# Altium PCB soldeerbout.PcbDoc (part 2 of 2)
Units mil, origin at the board's own origin, x right, y up, seen from the top; angles counter-clockwise.
Board outline 6625 x 4130 mil, 2 copper layers (Top Layer, Bottom Layer); 76 components, 74 nets, 291 pads, 71 vias.
Unrouted connection lines stored in the file: 2.
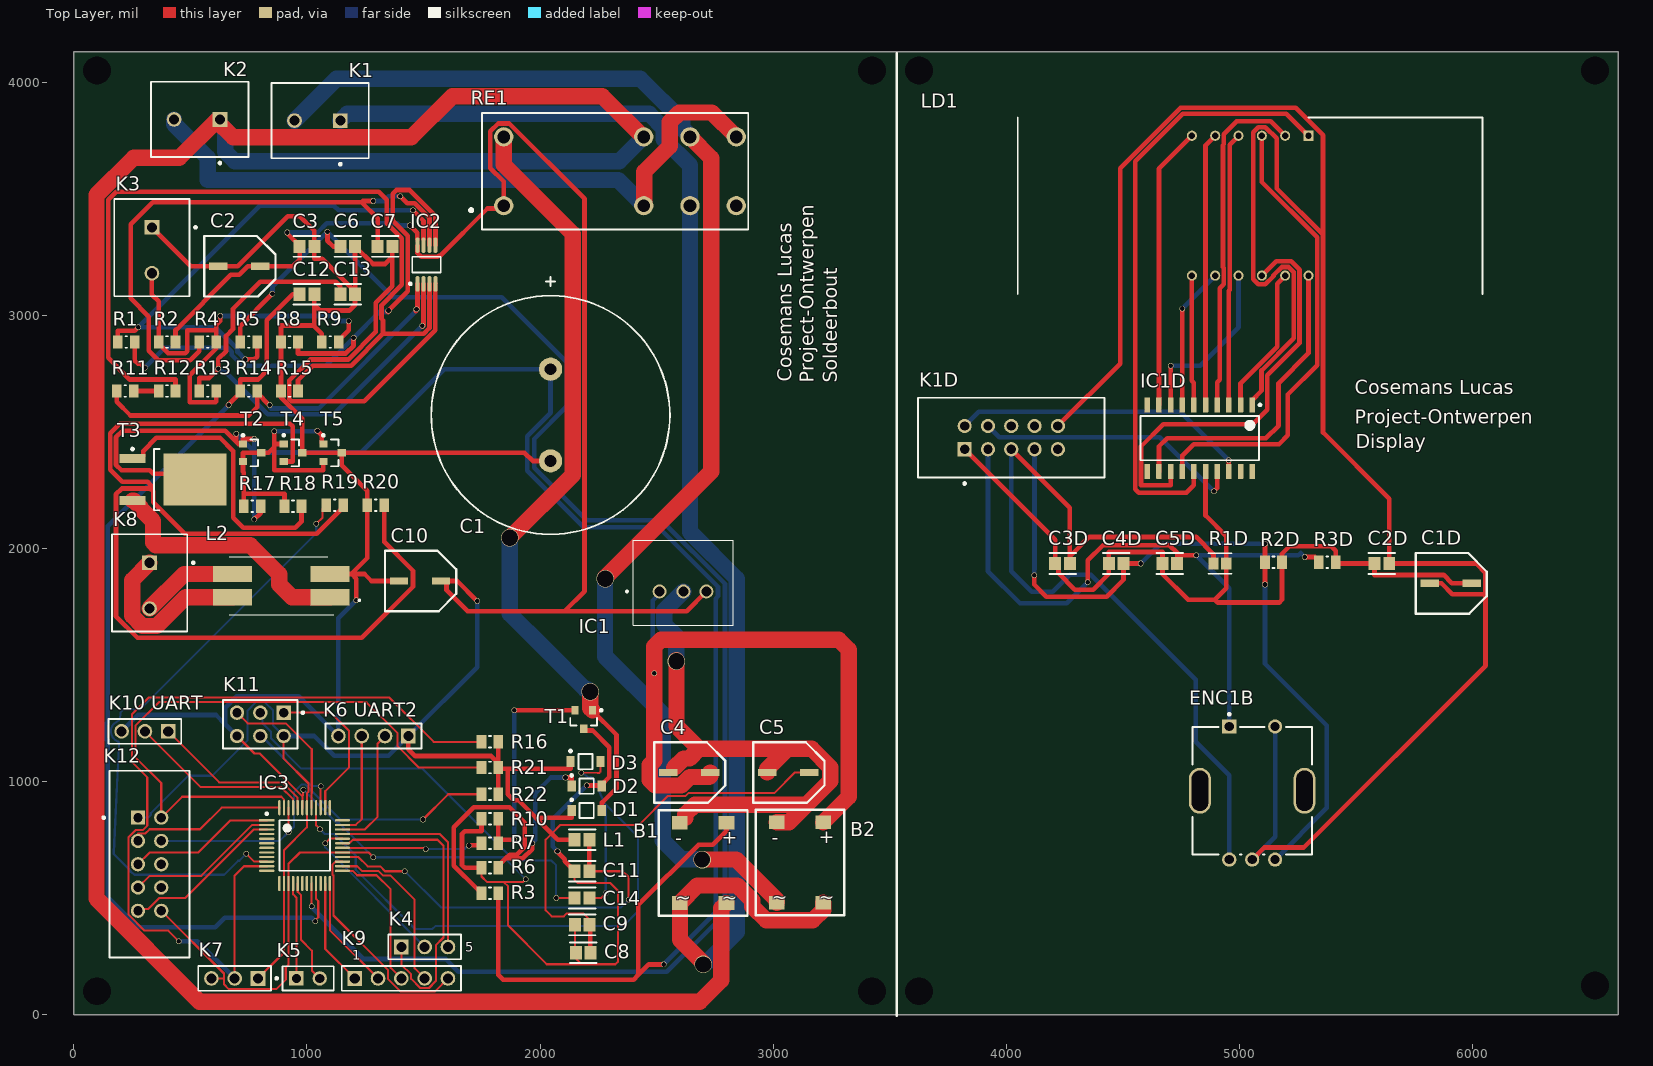
[diagram p0: Top Layer view]

## Via types
v1: diameter 24, hole 20, Top Layer to Bottom Layer, 65 vias
v2: diameter 75, hole 70, Top Layer to Bottom Layer, 6 vias

## Nets (pads, with @x,y where several pads share a name; then routed paths per layer and width w, separated by ;. In a path a pad name is that pad's centre, name@x,y a point inside that pad or via, vN(x,y) a via of type N, cw(c..) or ccw(c..) an arc to the next point about the centre after c; other vN are vias at no path point) (continued)
NetR19_2: (continued)
  Top Layer w20: T4.2 939,2372.6 939,2523.28 927.28,2535 196.72,2535 155.67,2493.95 155.67,2337.83 208.5,2285 316.89,2285 328.6,2273.28 328.6,2256.72 328.44,2256.56 ; R19.2 1156.42,2177.13 1042.58,2063.28 476.15,2063.28 341,2198.43 341,2244 328.44,2256.56 ; R20.2 1331.42,2027.58 1455,1904 1455,1836 1235.57,1616.57 273.22,1616.57 180.67,1709.13 180.67,2231.13 206.09,2256.56 328.44,2256.56
PC0: IC3.10 R19.1 | length 2713.9
  Top Layer w9: v1(740,690) 773.9,656.1 IC3.10 ; v1(1040,2105) 1067.41,2132.41 1067.41,2168.83 R19.1
  Bottom Layer w9: 193.37,1163.65 cw(c184.38,1164.02) 193.36,1163.54 ; 193.38,1164.01 193.38,1167.74 ; v1(740,690) 710,660 705,660 644.99,599.99 260.01,599.99 255.63,604.37 ; v1(1040,2105) 1040,2065 284.5,1309.5 214.5,1309.5 199.48,1294.48 198.21,1267.26 193.1,1262.16 179.86,1253.52 ccw(c205,1215) 182.96,1174.63 190.74,1170.38 193.38,1167.74 ; 193.36,1163.54 193.38,1163.81 193.38,1167.74 ; 193.36,1163.54 171.39,692.55 171.39,688.61 234.37,625.63 ; 234.37,625.63 ccw(c275,645) 255.63,604.37 ; 234.37,625.63 255.63,604.37
PD0: C6.1 IC3.20 R5.1 | length 7034.7
  Top Layer w9: IC3.20 1019.71,562.4 v1@1019.71,460.29
  Top Layer w20: R5.1 713.58,2953.58 v1(852,3092) ; v1(1088,3358) 1088,3320 1113,3295 C6.1
  Bottom Layer w20: v1(852,3092) 852,3122 v1(1088,3358) 1368.54,3077.46 1835.23,3077.46 2115,2797.69 2115,2609.1 1975,2469.1 1975,2346.01 2200.17,2120.84 2520.59,2120.84 2793.33,1848.1 2793.33,433.07 2543.25,183 1649.83,183 1594.32,238.5 1241.5,238.5 v1@1019.71,460.29
  other v1: 1020,465
PD1: C12.1 IC3.21 R14.1 | length 4135.5
  Top Layer w9: v1(1035,400) 1035,404.06 1048.5,417.56 1048.5,486.81 1039.21,496.09 IC3.21
  Top Layer w20: v1@660.77,2614.31 713.58,2667.13 R14.1 713.58,2724 790,2724 828,2762 828,2978 940,3090 C12.1
  Bottom Layer w20: v1@660.77,2614.31 660,2610 145.58,2095.58 145.58,1255.08 134.5,1244.01 134.5,1185.99 145.58,1174.92 145.58,502.99 273.57,375 607.29,375 647.29,415 1020,415 v1(1035,400)
  other v1: 665,2615
PD2: D2.1 R3.1 R6.2 | length 1558.9
  Top Layer w20: R3.1 1748.58,527.87 1737.91,538.54 1730.04,538.54 1630,638.58 1630,804 1715,889 1869,889 1935,823 1935,720 1901,686 1869.54,686 1853.54,670 ; R6.2 1821.42,637.87 1853.54,670 ; v1(1966,735) 1966,710 1926,670 1853.54,670 ; v1(2109,1017) 2135.63,1017 D2.1
  Bottom Layer w20: v1(1966,735) 1980,749 1980,950 2047,1017 v1(2109,1017)
PE0: IC3.30 R7.1 | length 603.5
  Top Layer w9: IC3.30 1505.78,715.16 v1@1510.94,710
  Top Layer w20: v1@1695.77,725.77 1739.35,725.77 R7.1
  Bottom Layer w9: v1@1510.94,710 1675.94,710 v1@1690.94,725
  other v1: 1510,710 1695,725
Vin: B1.1 C1.2 R3.2 R17.2 T2.1 T3.2 | length 8234.2
  Top Layer w20: T3.2@497.72,2320.24 340.76,2320.24 326,2335 204.53,2335 180.67,2358.87 180.67,2476.46 209.21,2505 649,2505 697,2457 ; v1(697,2491) 697,2457 ; v1(774,2124) 801.42,2151.42 R17.2 ; v1(774,2469) 725.63,2469 T2.1 706.6,2447.4 697,2457 ; R3.2 1821.42,170 1841.42,150 2402,150 2422,170 ; v1(2530,215) 2467,215 2422,170 ; B1.1 2800,789 2740,729 2680,729 2422,471 2422,170
  Bottom Layer w20: v1(697,2491) 774,2414 ; v1(774,2124) 774,2414 ; v1(774,2469) 774,2414 ; v1(2530,215) 2753.5,438.5 2753.5,1784.5 2763.33,1794.33 2763.33,1835.67 2508.16,2090.84 2187.74,2090.84 1945,2333.58 1945,2481.53 2045,2581.53 C1.2 1588.7,2768.7 1231,2411 777,2411 774,2414
pads on no net: ENC1B.3 ENC1B.4 IC1D.10 IC1D.11 IC1D.19 IC1D.20 IC3.4 IC3.5 IC3.6 IC3.7 IC3.8 IC3.9 IC3.12 IC3.13 IC3.18 IC3.19 IC3.22 IC3.36 IC3.37 K1D.6 K1D.8 K1D.9 K12.6 K12.8 RE1.14

## Silkscreen, mask and mechanical layers (free items; w line width, h text height)
Top Overlay:
  lines w10: 3530,-5 3530,4125
  text "Cosemans Lucas" at 3080,2715 h60 r90
  text "Project-Ontwerpen" at 3175.01,2710 h60 r90
  text "Soldeerbout" at 3275,2710 h60 r90
  text "Cosemans Lucas" at 5495,2660 h60
  text "Project-Ontwerpen" at 5495.59,2534.31 h60
  text "Display" at 5500,2429.99 h60

## Text inside footprints (layer, text, board x,y; h text height)
B1: Top Overlay "~" at 2580,473.37 h60; Top Overlay "~" at 2780,473.37 h60; Top Overlay "-" at 2580,728.36 h60; Top Overlay "+" at 2780,733.35 h60
B2: Top Overlay "~" at 2995,475.02 h60; Top Overlay "~" at 3195,475.02 h60; Top Overlay "-" at 2995,730.01 h60; Top Overlay "+" at 3195,735 h60
K9: Top Overlay "5" at 1680,270 h40; Top Overlay "1" at 1195,235 h40